# EAGLE board SparkFun_TMC6300_Breakout-MiddleJig (EAGLE 9.6.2)

Size 27.94 x 33.02 mm. Coordinates in mm from the lower left corner, seen from the top.
Outline: 0,30.48 arc-80 2.54,33.02 25.4,33.02 arc-80 27.94,30.48 27.94,2.54 arc-80 25.4,0 2.54,0 arc-80 0,2.54 0,30.48
Outline: 8.89,26.67 19.05,26.67 19.05,6.35 8.89,6.35 8.89,26.67
Copper layers (1*16): Top 0.035mm / dielectric 1.5mm / Bottom 0.035mm
Design rules "SparkFun-2-Layer-General-JLCPCB": minimum track width 7mil, minimum drill 0.3mm, track to track 7mil, track to pad 7mil, pad to pad 7mil, via to via 7mil, smd to smd 7mil, copper to edge 7mil, drill to drill 7mil, minimum pad ring 7mil, minimum via ring 7mil, stop-mask expansion 3mil, vias tented up to drill 25mil, thermal gap 10mil
Holes 1.7 mm at 7.75,7.62 7.49,10.16 7.75,12.7 7.49,15.24 7.75,17.78 7.49,20.32 7.75,22.86 7.49,25.4 20.19,25.4 20.45,22.86 20.19,20.32 20.45,17.78 20.19,15.24 20.45,12.7 20.19,10.16 20.45,7.62

## Footprints (pad centres in the part's own frame; a part is rotated, then mirrored left to right if it is on the bottom)
STAND-OFF-TIGHT = hole 3.048: 0,0
NUBBIN_LOCKER = hole 2.794: 0,0

## Placement (x,y rotation side)
E$1  [STAND-OFF-TIGHT]  3.17,6.35 0 top
E$2  [STAND-OFF-TIGHT]  3.17,26.67 0 top
E$3  [STAND-OFF-TIGHT]  24.77,6.35 0 top
E$4  [STAND-OFF-TIGHT]  24.77,26.67 0 top
E$5  [NUBBIN_LOCKER]  13.97,2.03 0 top
E$6  [NUBBIN_LOCKER]  13.97,30.99 0 top
FRAME1  FRAME-LETTER  [CREATIVE_COMMONS]  80.01,-5.08 0 bottom  (outside the outline)
LOGO1  OSHW-LOGONO_SILK  [DUMMY]  66.04,3.81 0 top  (outside the outline)
LOGO2  SPECIAL_INSTRUCTIONS-ORDERING  [ORDERING_INSTRUCTIONS]  49.53,57.15 0 bottom  (outside the outline)
U$1  [#GND#1]  17.78,22.86 0 top
U$2  [#SEN#0]  17.91,12.7 0 top
U$3  [#DIAG#0]  17.27,10.16 0 top
U$9  [#U#6]  18.54,20.32 0 top
U$12  [#VCP#0]  10.41,7.62 0 top
U$13  [#VIO#1]  9.91,25.4 0 top
U$15  [63001]  13.97,11.81 0 top
U$16  [D0]  15.88,22.86 0 bottom
U$17  [TMC63000]  13.84,13.21 0 bottom
U$18  [D0]  13.97,20.95 0 top
U$19  [S1]  13.97,25.4 0 top
U$20  [V2]  13.97,8.76 0 top
U$21  [#UH#5]  9.65,20.32 0 top
U$22  [#UL#4]  9.78,22.86 0 top
U$23  [TMC0]  13.97,12.95 0 top
U$24  [#VIN#0]  17.78,25.4 0 top
U$25  [#V#7]  18.8,17.78 0 top
U$26  [V2]  15.88,7.62 0 bottom
U$27  [S1]  11.94,22.86 0 bottom
U$28  [#GND#1]  17.78,7.62 0 top
U$30  [#VH#2]  9.65,15.24 0 top
U$31  [#VL#3]  9.91,17.78 0 top
U$32  [#W#8]  18.41,15.24 0 top
U$33  [#WH#1]  9.91,10.16 0 top
U$34  [#WL#0]  10.03,12.7 0 top
U$36  SPARKX-LOGO2  [SPARKX-TINY]  13.97,21.59 0 bottom
U$37  SPARKX-LOGO2  [SPARKX-TINY]  13.97,19.43 0 top

## Library data of the parts
E$1-E$6 = SparkFun-Hardware
FRAME1 = SparkFun-Aesthetics; DESIGNER: Ricardo Ramos
LOGO1 LOGO2 = SparkFun-Aesthetics
U$1-U$3 U$9 U$12 U$13 U$15-U$28 U$30-U$34 = output
U$36 U$37 = SparkX

## Text on the board
Top: Up-MiddleLayer
Bottom: Down-MiddleLayer
tPlace: #X1 | TMC6300 | SPX-21220
Measures: Dimensions in inches
bDocu: Board thickness is 1.6mm | 4 Layer Board | N. Seidle